# Altium PCB ife19_Elec_TS_BrakePedal.PcbDoc
Units mm, origin at the board's own origin, x right, y up, seen from the top; angles counter-clockwise.
Board outline 21.84 x 27.94 mm, 2 copper layers (Top Layer, Bottom Layer); 2 components, 3 nets, 10 pads, 1 vias.
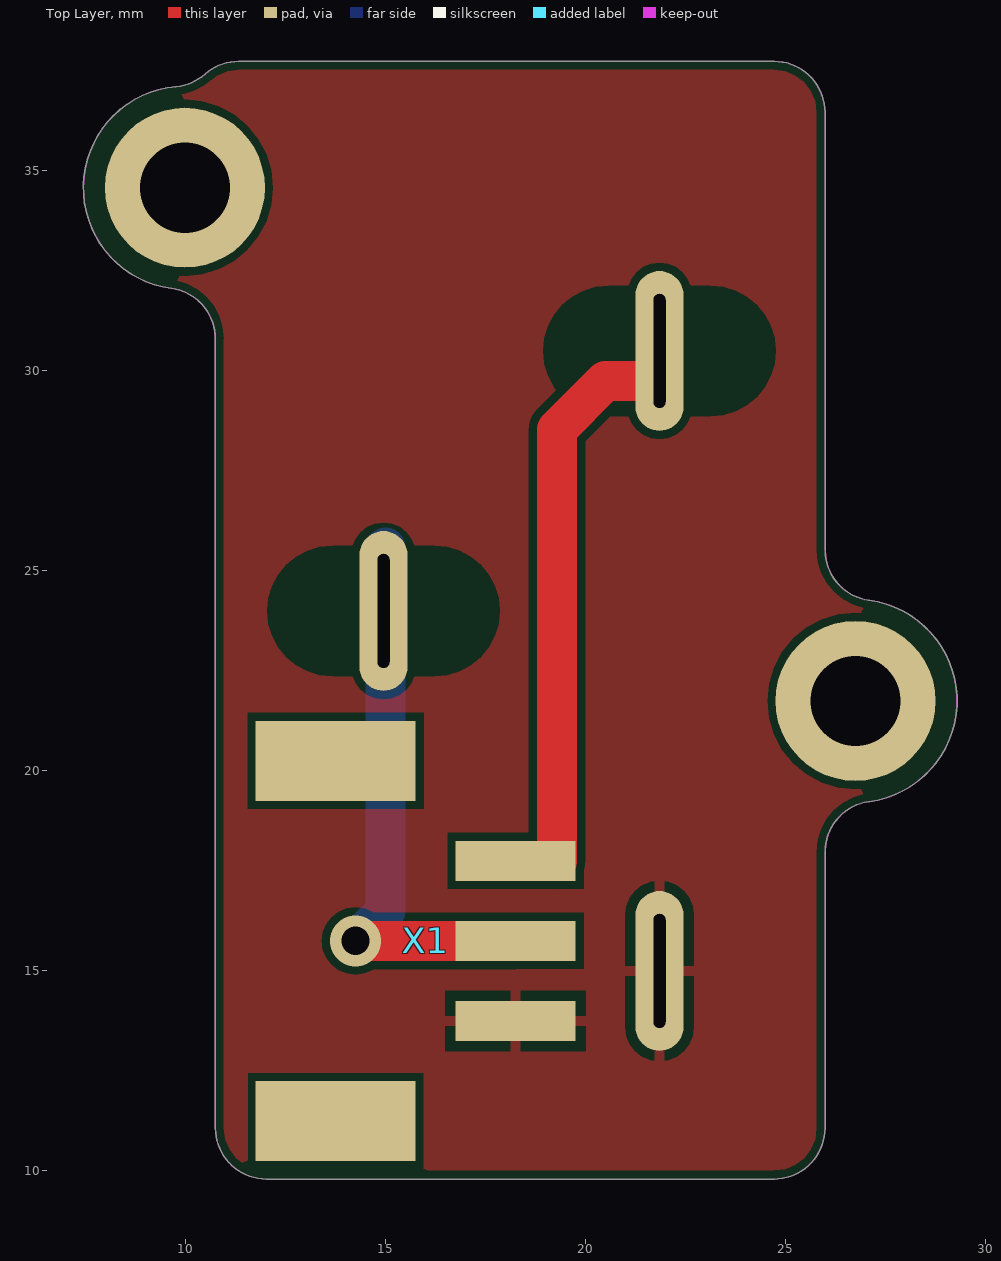
[diagram p0: Top Layer view]
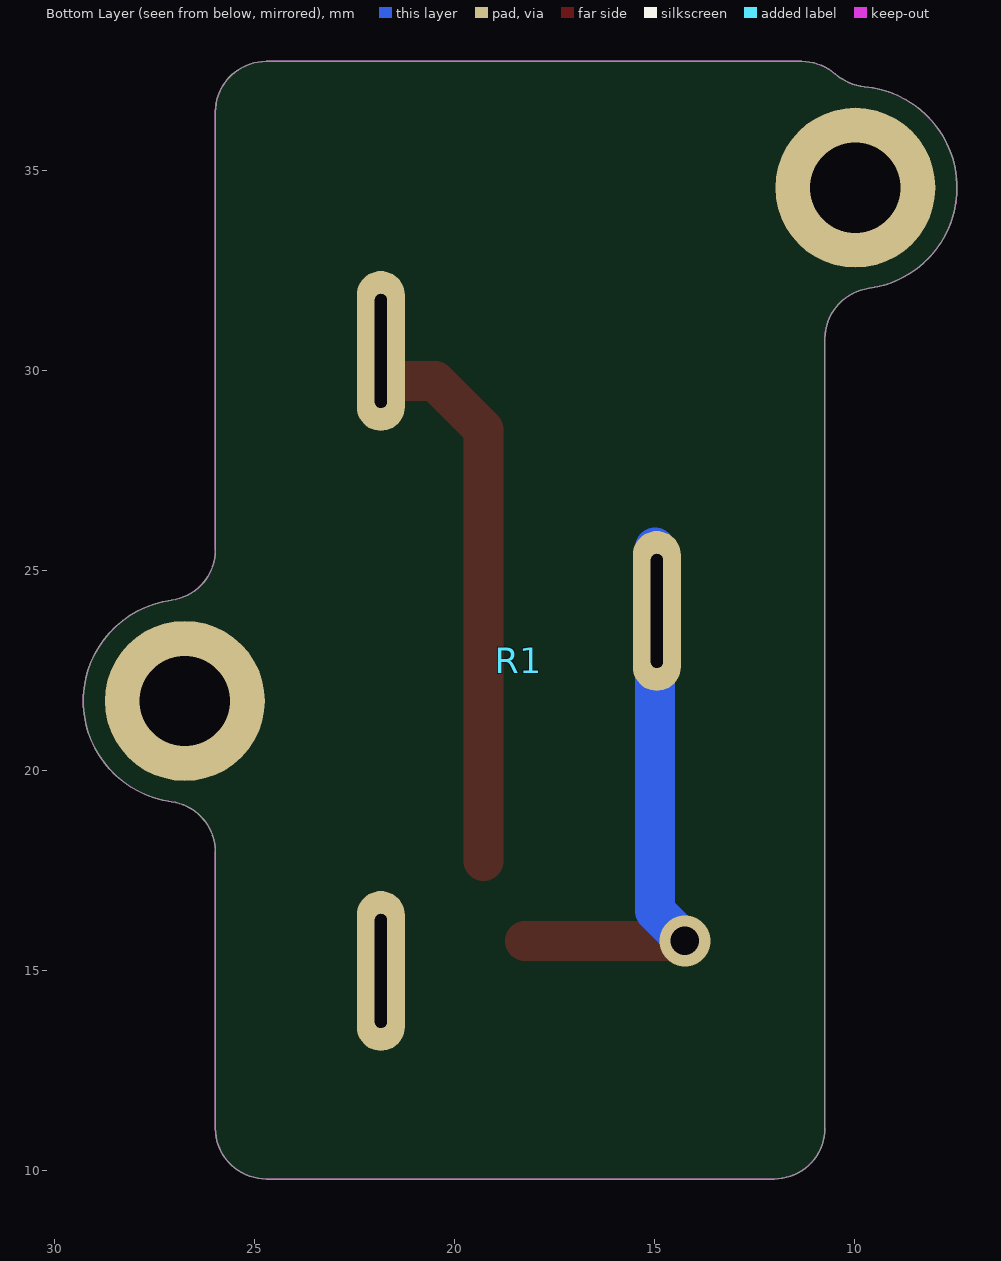
[diagram p1: Bottom Layer view, seen from below]

## Layer stack, top to bottom
Top Solder: solder mask 0.0102, Solder Resist, Dk 3.5
Top Layer: signal copper 0.0356
Dielectric 1: dielectric 0.32, FR-4, Dk 4.8
Bottom Layer: signal copper 0.0356
Bottom Solder: solder mask 0.0102, Solder Resist, Dk 3.5

## Board outline
10.748,30.804 ccw(c9.478,30.804) 9.647,32.063 cw(c9.986,34.58) 9.762,37.11 ccw(c9.649,38.375) 10.488,37.422 cw(c11.327,36.468) 11.327,37.738 24.718,37.738 cw(c24.718,36.468) 25.988,36.468 25.988,25.526 ccw(c27.258,25.526) 27.089,24.267 cw(c26.75,21.75) 27.089,19.233 ccw(c27.258,17.974) 25.988,17.974 25.988,11.068 cw(c24.718,11.068) 24.718,9.798 12.018,9.798 cw(c12.018,11.068) 10.748,11.068

## Design rules (kind name [scope] priority, off if disabled: settings)
Clearance [All] p1: gap=0.2 ignorepadtopadclearanceinfootprint=FALSE
PolygonConnect [All] p1: connectstyle=Relief reliefconductorwidth=0.254 reliefentries=4 polygonreliefangle="90 Angle" airgapwidth=0.254
RoutingVias [All] p1: holewidth=0.711 width=1.27 viastyle="Through Hole" minholewidth=0.711 minwidth=1.27 maxholewidth=0.711 maxwidth=1.27
SolderMaskExpansion [All] p1: expansion=0.102
Width [All] p1: maxlimit=2.54 minlimit=0.152 preferedwidth=1
30 further rules are at their usual default settings.

## Components (designator, comment, footprint, x,y, rotation, side; value= is the part's Value field where it differs from the comment)
R1 "POT_BEI9605" POT_BEI9605 19.75,24 r90 bottom
X1 "Molex 505575-03 3 Position 2.00mm pitch connector wire to board connector Datasheet" 505578-03 17.75,15.75 r90 top

## Footprints (in the part's own frame and the unit in brackets; to place one, negate y for a bottom-side part, rotate by r counter-clockwise, add the part's x,y. Pads: shape width x height; smd on the part's side, far side on the other; paste and mask are expansions set on the pad)
505578-03 [mm]
  rect 1x3 smd: 1(-2,-0.5) 2(0,-0.5) 3(2,-0.5)
  rect 2x4 smd: P$3(-4.5,4) P$4(4.5,4)
  body extent -5,-1.1 5,8.35, height 5.9
POT_BEI9605 [mm]
  oval 4x1.2 hole 2.85 slot 0.3 at 90 deg: 1(6.5,2.1) 2(0,-4.8) 3(-9,2.1)
  body extent -13.45,-7.7 34.05,5, height 9

## Part data
X1: library part POS3_ML505578-03, Package=505575-03, DeviceSetName=505575-03, GateName_1=G$1, LibraryName="MOLEX Micro-Lock", SymbolName_1=3POS

## Free pads (board coordinates)
  round 4 hole 2.26: 5(9.986,34.58) 5(26.75,21.75)

## Via types
v1: diameter 1.27, hole 0.711, Top Layer to Bottom Layer, 1 vias

## Nets (pads, with @x,y where several pads share a name; then routed paths per layer and width w, separated by ;. In a path a pad name is that pad's centre, name@x,y a point inside that pad or via, vN(x,y) a via of type N, cw(c..) or ccw(c..) an arc to the next point about the centre after c; other vN are vias at no path point)
5V: R1.1 X1.3 | length 14.6
  Top Layer w1: X1.3@19.282,17.75 19.282,28.532 20.5,29.75 21.758,29.75 21.85,29.842 R1.1
GND: R1.3 X1.1
NetR1_2: R1.2 X1.2 | length 15.8
  Top Layer w1: v1(14.25,15.75) X1.2
  Bottom Layer w1: v1(14.25,15.75) 15,16.5 15,25.591 14.988,25.58 14.988,24.038 R1.2
pads on no net: X1.P$3 X1.P$4

## Polygon pours and split planes (outlines as drawn)
GND on Top Layer "Top Layer-GND" (solid, remove dead copper, pour order 0): 6.5,8.5 31.25,8.5 31.25,39 6.5,39

## Keep-outs
Keep-Out Layer:
  the board outline again, w0.02